# Altium PCB S4V_IMU_Sensor_Module_Board_V1.0_PCB.PcbDoc
Units mm, origin at the board's own origin, x right, y up, seen from the top; angles counter-clockwise.
Board outline 35 x 35 mm, 2 copper layers (Top Layer, Bottom Layer); 49 components, 33 nets, 214 pads, 90 vias.
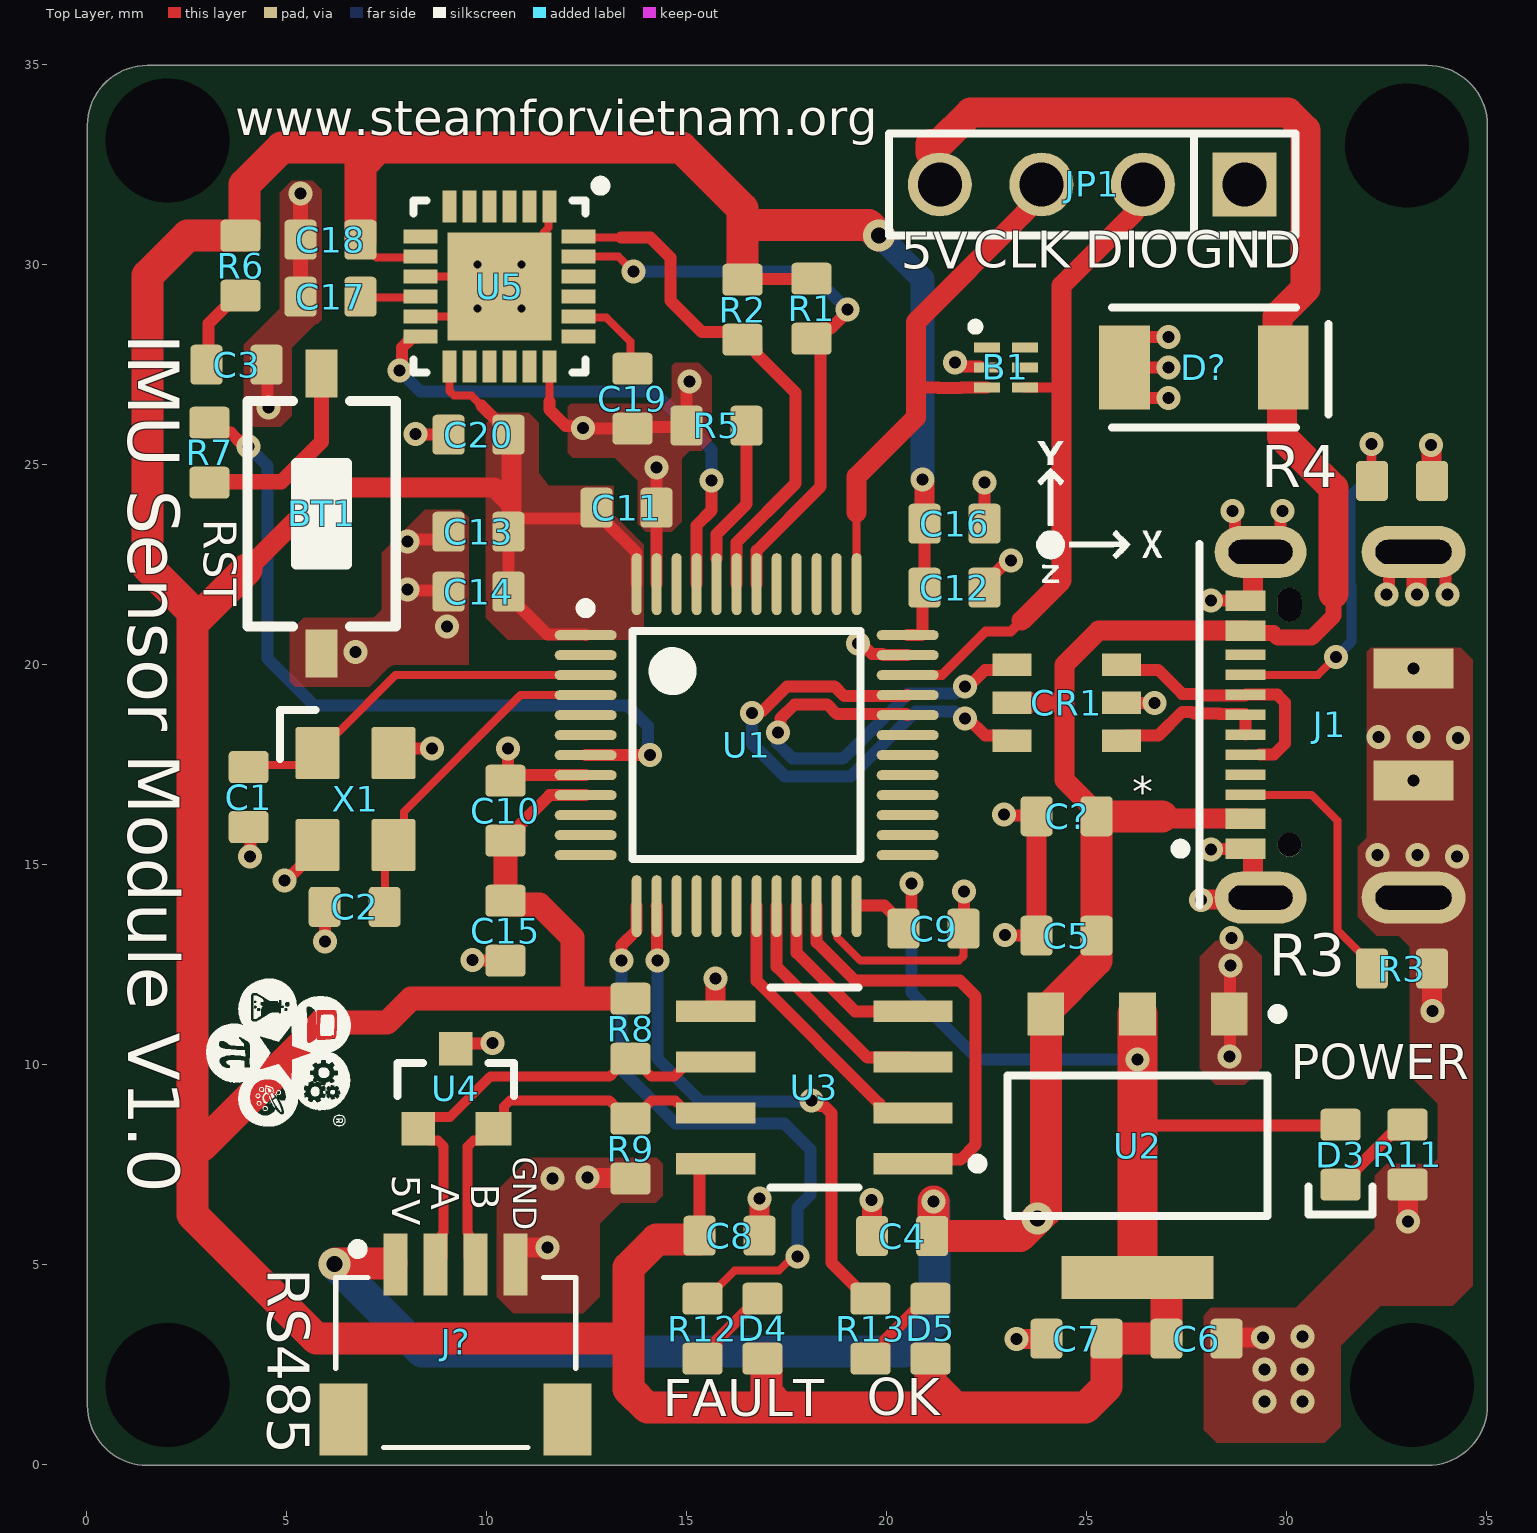
[diagram p0: Top Layer view]
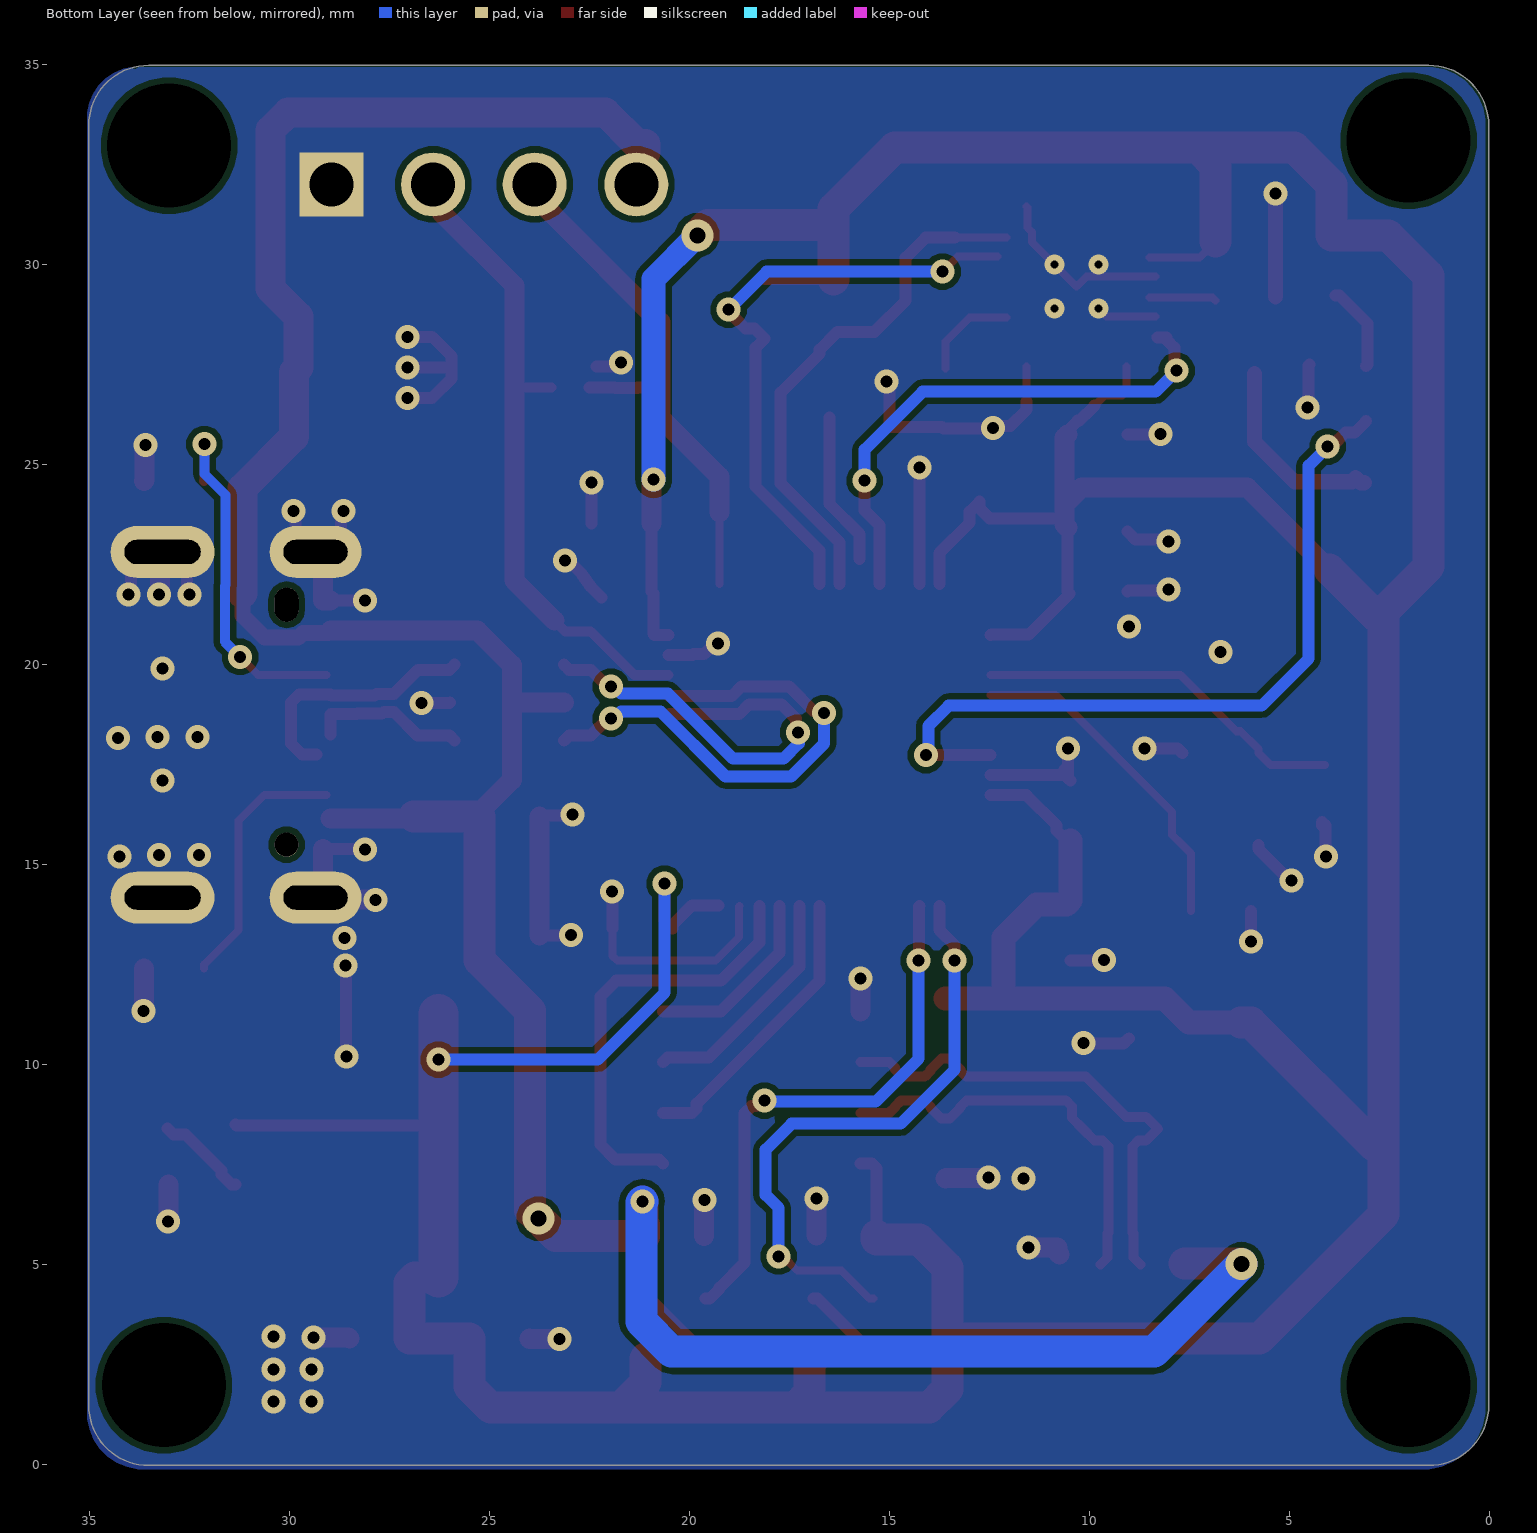
[diagram p1: Bottom Layer view, seen from below]
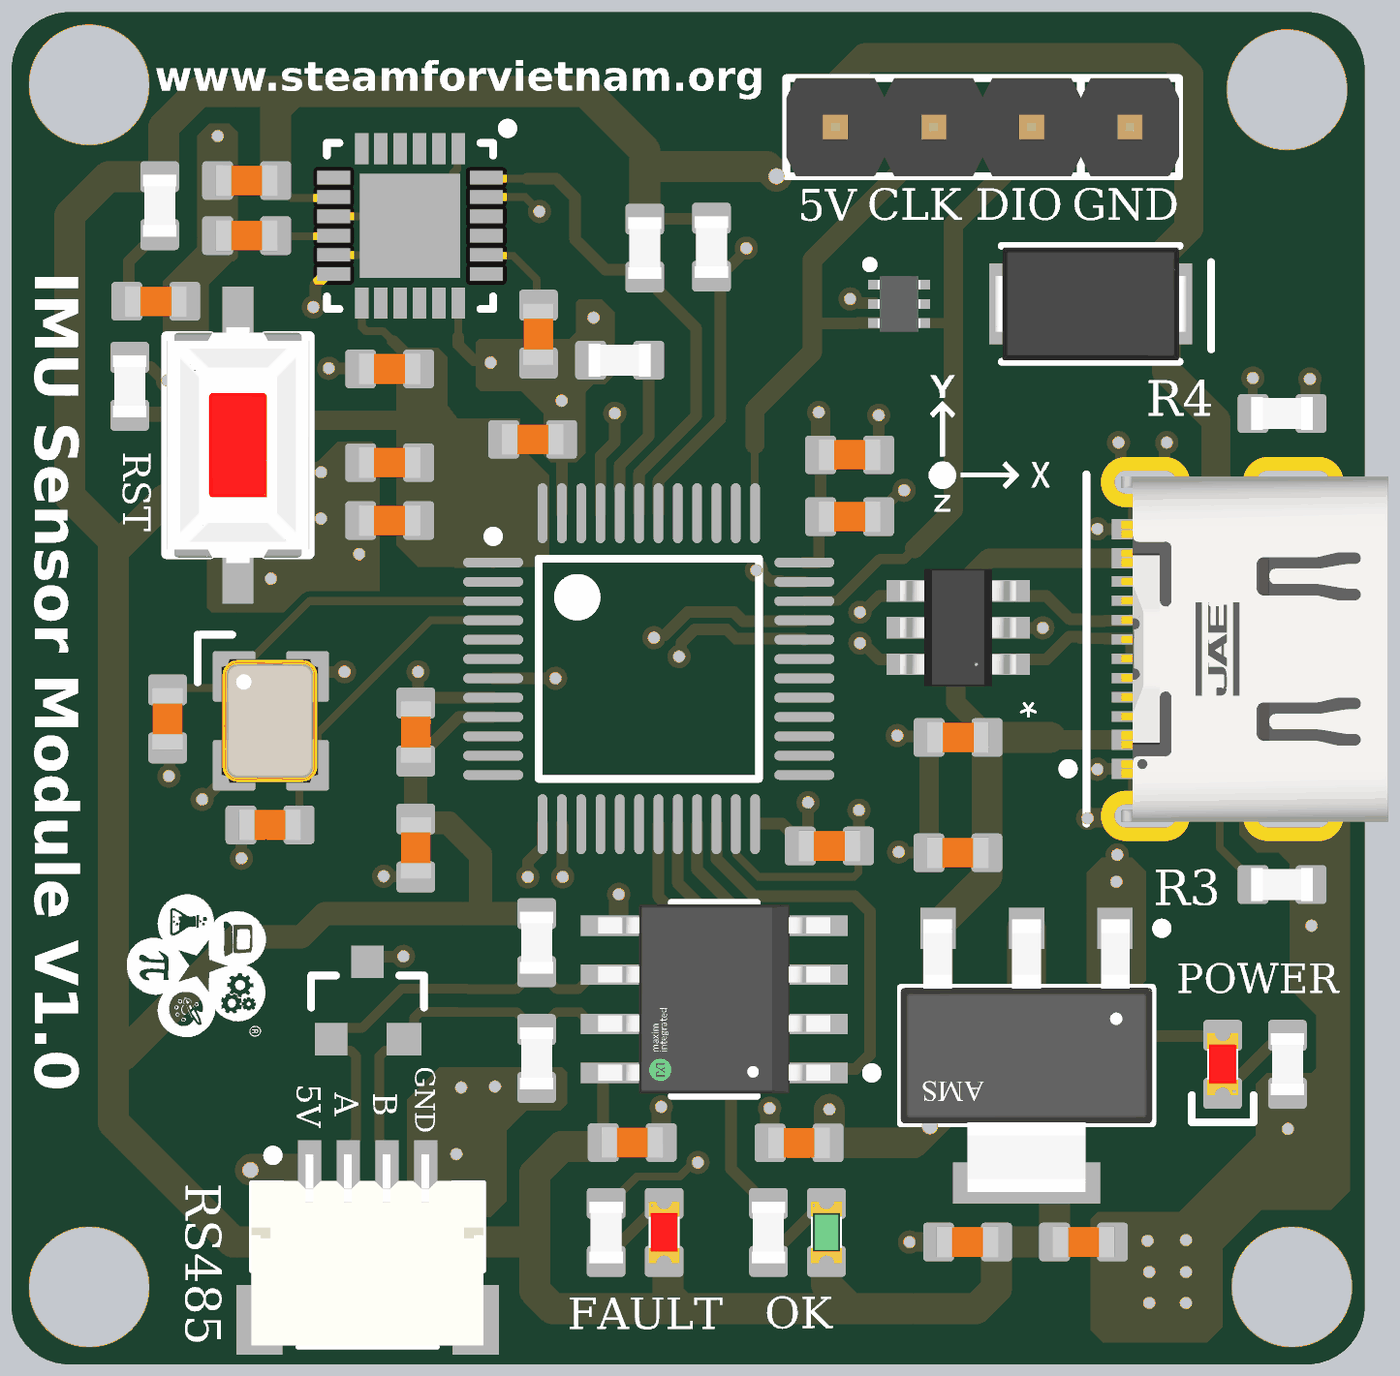
[diagram p2: 3D render of the assembled board from above, using the file's embedded part models]

## Layer stack, top to bottom
Top Solder: solder mask 0.0102, Solder Resist, Dk 3.5
Top Layer: signal copper 0.0356
Dielectric 1: dielectric 0.32, FR-4, Dk 4.8
Bottom Layer: signal copper 0.0356
Bottom Solder: solder mask 0.0102, Solder Resist, Dk 3.5

## Board outline
0.026,1.482 ccw(c1.526,1.482) 1.526,-0.018 33.526,-0.018 ccw(c33.526,1.482) 35.026,1.482 35.026,33.482 ccw(c33.526,33.482) 33.526,34.982 1.526,34.982 ccw(c1.526,33.482) 0.026,33.482

## Design rules (kind name [scope] priority, off if disabled: settings)
Clearance [All] p1: gap=0.15 ignorepadtopadclearanceinfootprint=TRUE
DiffPairsRouting DiffPairsRouting_RS485 [InDifferentialPairClass('120R')] p1: maxlimit=0.35 minlimit=0.35 mostfreqgap=0.35 toplayer_minwidth=0.25 toplayer_maxwidth=0.25 toplayer_prefwidth=0.25 bottomlayer_minwidth=0.25 bottomlayer_maxwidth=0.25 bottomlayer_prefwidth=0.25 impedanceprofiledriven=TRUE impedanceprofileid={570E3273-004C-4F14-956F-33786543DF5A} impedanceprofilevalue=120.000000 maxuncoupledlength=12.7
DiffPairsRouting DiffPairsRouting_1 [InDifferentialPairClass('90R')] p2: maxlimit=0.15 minlimit=0.15 mostfreqgap=0.15 toplayer_minwidth=0.3 toplayer_maxwidth=0.3 toplayer_prefwidth=0.3 bottomlayer_minwidth=0.3 bottomlayer_maxwidth=0.3 bottomlayer_prefwidth=0.3 impedanceprofiledriven=TRUE impedanceprofileid={4109E06E-1CCC-4906-AD44-ED409D68766E} impedanceprofilevalue=90.000000 maxuncoupledlength=12.7
DiffPairsRouting [All] p3: maxlimit=0.254 minlimit=0.254 mostfreqgap=0.254 toplayer_minwidth=0.381 toplayer_maxwidth=0.381 toplayer_prefwidth=0.381 bottomlayer_minwidth=0.381 bottomlayer_maxwidth=0.381 bottomlayer_prefwidth=0.381 maxuncoupledlength=12.7
HoleSize [All] p1: absolutevalues=TRUE maxlimit=4 minlimit=0.2 maxpercent=80.000 minpercent=20.000
MinimumSolderMaskSliver MinimumSolderMaskSliver_IMU [InComponent('U5')] p1: minsoldermaskwidth=0
MinimumSolderMaskSliver [All] p2: minsoldermaskwidth=0.2
PolygonConnect [All] p1: connectstyle=Direct reliefconductorwidth=0.254 reliefentries=4 polygonreliefangle="90 Angle" airgapwidth=0.254
RoutingVias [All] p1: holewidth=0.3 width=0.6 viastyle="Through Hole" minholewidth=0.2 minwidth=0.2 maxholewidth=0.4 maxwidth=0.8
SilkToSilkClearance [All] p1: silktosilkclearance=0.1
SilkToSolderMaskClearance [IsPad] p1: minsilkscreentomaskgap=0.1 clearancetoexposedcopper=TRUE
SolderMaskExpansion SolderMaskExpansion_VIA [IsVia] p1: expansion=0.102 istentingtop=TRUE
SolderMaskExpansion [All] p2: expansion=0 istentingtop=FALSE
Width [All] p1: maxlimit=1.3 minlimit=0.2 preferedwidth=0.254
25 further rules are at their usual default settings.

## Classes and differential pairs
differential pair class 120R: RS485
differential pair class 90R: USB_D USB_D_CON
differential pair USB_D: +USB_D_P -USB_D_N
differential pair USB_D_CON: +USB_D_CON_P -USB_D_CON_N
differential pair RS485: +RS485_P -RS485_N

## Components (designator, comment, footprint, x,y, rotation, side; value= is the part's Value field where it differs from the comment)
B1 "ESDALC6V1-5M6" ESDALC6V15M6 22.987,27.432 r270 top
BT1 "Nut Nhan 2 Chan SMD 3x6x2.5" "Nut Nhan 2 Chan SMD 3x6x2.5" 5.88,23.773 r270 top
C1 "20pF" CAP_0603 4.059,16.689 r90 top
C2 "20pF" CAP_0603 6.707,13.944 r0 top
C3 "100nF" CAP_0603 3.755,27.498 r180 top
C4 "10uF" CAP_0603 20.396,5.714 r0 top
C5 "100nF" CAP_0603 24.505,13.223 r0 top
C6 "10uF" CAP_0603 27.755,3.148 r180 top
C7 "100nF" CAP_0603 24.755,3.148 r0 top
C8 "1uF" CAP_0603 16.08,5.723 r180 top
C9 "10uF" CAP_0603 21.18,13.398 r180 top
C10 "100nF" CAP_0603 10.48,16.348 r270 top
C11 "100nF" CAP_0603 13.505,23.923 r180 top
C12 "100nF" CAP_0603 21.705,21.923 r180 top
C13 "100nF" CAP_0603 9.805,23.323 r0 top
C14 "100nF" CAP_0603 9.805,21.823 r0 top
C15 "1uF" CAP_0603 10.48,13.348 r90 top
C16 "100nF" CAP_0603 21.705,23.523 r180 top
C17 "100nF" CAP_0603 6.105,29.198 r0 top
C18 "10nF" CAP_0603 6.105,30.623 r0 top
C19 "2.2nF" CAP_0603 13.655,26.648 r90 top
C20 "100nF" CAP_0603 9.805,25.748 r0 top
C? "100nF" CAP_0603 24.509,16.21 r0 top
CR1 "USBLC6-2SC6" SOT23-6L_STM 24.511,19.05 r180 top
D3 "RED" LED_0603_RED 31.355,7.748 r90 top
D4 "RED" LED_0603_RED 16.905,3.398 r270 top
D5 "GREEN" LED_0603_GREEN 21.105,3.398 r270 top
D? "SMAJ5.0A" BOUR-SMA-2_V 27.94,27.432 r0 top
J1 "DX07S016JA3R1500" FP-DX07S016JA3R1500-MFG 32.03,18.498 r90 top
J? "JST_SH1.0" JST_SM04B-SRSS-TB(LF)(SN) 9.235,5.006 r0 top
JP1 "JP 1x04" "JP 1x4 DT" 28.956,32.004 r180 top
R1 "4.7k" RES_0603 18.13,28.898 r90 top
R2 "4.7k" RES_0603 16.405,28.873 r90 top
R3 "5.1k" RES_0603 32.891,12.4 r0 top
R4 "5.1k" RES_0603 32.891,24.592 r0 top
R5 "10k" RES_0603 15.755,25.973 r180 top
R6 "10k" RES_0603 3.855,29.973 r90 top
R7 "330" RES_0603 3.08,25.298 r270 top
R8 "1k" RES_0603 13.605,10.898 r270 top
R9 "1k" RES_0603 13.605,7.898 r90 top
R11 "1k" RES_0603 33.03,7.748 r270 top
R12 "1k" RES_0603 15.405,3.398 r90 top
R13 "1k" RES_0603 19.605,3.398 r90 top
U1 "STM32F103C8T6" STM-LQFP48_L 16.508,17.988 r0 top
U2 "AMS1117-3.3" FP-AMS1117-IPC_C 26.28,7.973 r270 top
U3 "MAX3485ESA+" FP-S8-5-MFG 18.201,9.43 r180 top
U4 "PSM712-LF-T7" PRKT-SOT23-3_V 9.235,9.396 r90 top
U5 "MPU-6050" IS-QFN-24_V 10.33,29.448 r270 top
X1 "8MHz" XTAL_3225 6.731,16.637 r270 top

## Footprints (in the part's own frame and the unit in brackets; to place one, negate y for a bottom-side part, rotate by r counter-clockwise, add the part's x,y. Pads: shape width x height; smd on the part's side, far side on the other; paste and mask are expansions set on the pad)
BOUR-SMA-2_V [mm] "SMA, 2-Leads, Body 4.57x2.92mm"
  rect 1.27x2.1 smd: 1(-1.985,0) 2(1.985,0)
  silkscreen extent -2.3,-1.5 3.12,1.5, body extent -2.5,-1.46 2.5,1.46, height 2.62
CAP_0603 [mm]
  rrect25% 0.8x1 smd: 1(-0.75,0) 2(0.75,0)
  body extent -0.8,-0.4 0.8,0.4, height 0.51
ESDALC6V15M6 [mm]
  rect 0.25x0.65 smd: 1(-0.5,-0.475) 2(0,-0.475) 3(0.5,-0.475) 4(0.5,0.475) 5(0,0.475) 6(-0.5,0.475)
  silkscreen extent -1.12,-0.86 -0.92,-0.66, body extent -0.73,-0.55 0.73,0.55, height 0.65
FP-AMS1117-IPC_C [mil]
  rect 42x36 smd paste+0 mask+0: 1(-129.72,90.16) 2(-129.72,0) 3(-129.72,-90.16)
  rect 42x150 smd paste+0 mask+0: 4(129.72,0)
  silkscreen extent -135,-128 69,143, body extent -153,-132 153,132, height 10
FP-DX07S016JA3R1500-MFG [mm]
  rrect100% 1.3x2.3 hole 1.6 slot 0.6 at 0 deg paste-2539.97 mask+0: 1(-4.32,2.675) 2(4.32,2.675)
  rrect100% 1.3x2.6 hole 1.9 slot 0.6 at 0 deg paste-2539.97 mask+0: 3(-4.32,-1.15) 6(4.32,-1.15)
  rect 1x2 smd paste+0 mask+0: 4(-1.4,-1.15) 5(1.4,-1.15)
  rect 0.52x1 smd paste+0 mask+0: A1/B12(-3.1,3.05) A4/B9(-2.35,3.05) A12/B1(3.1,3.05) B4/A9(2.35,3.05)
  rect 0.27x1 smd paste+0 mask+0: A5(-1.75,3.05) A6(-0.25,3.05) A7(0.75,3.05) A8(1.75,3.05) B5(1.25,3.05) B6(0.25,3.05) B7(-0.75,3.05) B8(-1.25,3.05)
  round 0.6 hole 0.6 unplated paste-2539.97 mask+0: ""(-3,1.95)
  rrect100% 0.85x0.6 hole 0.6 slot 0.85 at 0 deg unplated paste-2539.97 mask+0: ""(3,1.95)
  silkscreen extent -4.52,4.2 4.52,4.8, body extent -5.07,-3.9 5.07,3.92, height 0.25
FP-S8-5-MFG [mm]
  rect 1.98x0.53 smd paste+0 mask+0: 1(-2.465,1.905) 2(-2.465,0.635) 3(-2.465,-0.635) 4(-2.465,-1.905) 5(2.465,-1.905) 6(2.465,-0.635) 7(2.465,0.635) 8(2.465,1.905)
  silkscreen extent -4.2,-2.5 1.1,2.5, body extent -3.56,-2.75 3.55,2.75, height 0.25
IS-QFN-24_V [mm] "QFN, 24-Leads, Body 4x4mm, Pitch 0.5mm, Thermal Pad 2.7x2.6mm"
  rect 0.8x0.35 smd: 1(-2,1.25) 2(-2,0.75) 3(-2,0.25) 4(-2,-0.25) 5(-2,-0.75) 6(-2,-1.25) 13(2,-1.25) 14(2,-0.75) 15(2,-0.25) 16(2,0.25) 17(2,0.75) 18(2,1.25)
  rect 0.35x0.85 smd mask+0.102: 7(-1.25,-1.975) 8(-0.75,-1.975) 9(-0.25,-1.975) 10(0.25,-1.975) 11(0.75,-1.975) 12(1.25,-1.975) 19(1.25,1.975) 20(0.75,1.975) 21(0.25,1.975) 22(-0.25,1.975) 23(-0.75,1.975) 24(-1.25,1.975)
  rect 2.7x2.6 smd: 25(0,0)
  silkscreen extent -2.65,-2.15 2.15,2.65, body extent -2,-2 2,2, height 0.95
"JP 1x4 DT" [mm] "4 pins, 1 row, straight, gold plating"
  rect 1.6x1.6 hole 1.1: 1(0,0)
  round 1.6 hole 1.1: 2(2.54,0) 3(5.08,0) 4(7.62,0)
  silkscreen extent -1.27,-1.27 8.89,1.27, body extent -1.27,-1.27 8.89,1.27, height 8.54
JST_SM04B-SRSS-TB(LF)(SN) [mm]
  rect 0.6x1.55 smd: 1(-1.5,0) 2(-0.5,0) 3(0.5,0) 4(1.5,0)
  rect 1.2x1.8 smd: S1(-2.8,-3.875) S2(2.8,-3.875)
  silkscreen extent -3,-4.57 3,0.48, body extent -3.01,-4.53 2.99,0.42, height 2.91
LED_0603_GREEN [mm]
  rrect25% 0.8x1 smd: A(0.75,0) K(-0.75,0)
  body extent -0.8,-0.4 0.8,0.4, height 0.6
LED_0603_RED [mm]
  rrect25% 0.8x1 smd: A(0.75,0) K(-0.75,0)
  silkscreen extent -1.5,-0.8 -0.8,0.8, body extent -0.8,-0.4 0.8,0.4, height 0.6
"Nut Nhan 2 Chan SMD 3x6x2.5" [mm] "Switch SMD type"
  rect 1.2x0.8 smd: 1(-3.5,0) 2(3.5,0)
  silkscreen extent -2.82,-1.85 2.82,1.85, body extent -3.05,-1.85 3.05,1.85, height 2.5
PRKT-SOT23-3_V [mm] "SOT23, 3-Leads, Body 2.92x1.3mm, Pitch 0.94mm"
  rect 0.84x0.84 smd: 1(-1,0.94) 3(1,0)
  rect 0.84x0.9 smd: 2(-1,-0.94)
  silkscreen extent -0.18,-1.46 0.65,1.46, body extent -0.65,-1.46 0.65,1.46, height 1.17
RES_0603 [mm]
  rrect25% 0.8x1 smd: 1(-0.75,0) 2(0.75,0)
  body extent -0.8,-0.43 0.8,0.43, height 0.52
SOT23-6L_STM [mil]
  rect 38.5x22 smd paste+0 mask+0: 1(-53.75,37.4) 2(-53.75,0) 3(-53.75,-37.4) 4(53.75,-37.4) 5(53.75,0) 6(53.75,37.4)
  body extent -59,-60 59,60, height 57
STM-LQFP48_L [mm] "QFP, 48-Leads, Body 7x7mm, Pitch 0.5mm, IPC High Density"
  oval 1.55x0.25 smd: 1(-4.025,2.75) 2(-4.025,2.25) 3(-4.025,1.75) 4(-4.025,1.25) 5(-4.025,0.75) 6(-4.025,0.25) 7(-4.025,-0.25) 8(-4.025,-0.75) 9(-4.025,-1.25) 10(-4.025,-1.75) 11(-4.025,-2.25) 12(-4.025,-2.75) 25(4.025,-2.75) 26(4.025,-2.25) 27(4.025,-1.75) 28(4.025,-1.25) 29(4.025,-0.75) 30(4.025,-0.25) 31(4.025,0.25) 32(4.025,0.75) 33(4.025,1.25) 34(4.025,1.75) 35(4.025,2.25) 36(4.025,2.75)
  oval 0.25x1.55 smd: 13(-2.75,-4.025) 14(-2.25,-4.025) 15(-1.75,-4.025) 16(-1.25,-4.025) 17(-0.75,-4.025) 18(-0.25,-4.025) 19(0.25,-4.025) 20(0.75,-4.025) 21(1.25,-4.025) 22(1.75,-4.025) 23(2.25,-4.025) 24(2.75,-4.025) 37(2.75,4.025) 38(2.25,4.025) 39(1.75,4.025) 40(1.25,4.025) 41(0.75,4.025) 42(0.25,4.025) 43(-0.25,4.025) 44(-0.75,4.025) 45(-1.25,4.025) 46(-1.75,4.025) 47(-2.25,4.025) 48(-2.75,4.025)
  silkscreen extent -4.15,-2.85 2.85,3.55, body extent -3.5,-3.5 3.5,3.5, height 1.6
XTAL_3225 [mm]
  rrect10% 1.3x1.1 smd: 1(-1.15,-0.95) 2(1.15,-0.95) 3(1.15,0.95) 4(-1.15,0.95)
  silkscreen extent -2.23,-1.89 -1,-1, body extent -1.6,-1.28 1.6,1.23, height 0.61

## Part data
B1: "STMicroelectronics ESDALC6V1-5M6 Quint Uni-Directional TVS Diode, 30W peak, 6-Pin uQFN", Manufacturer_Name=STMicroelectronics, Mouser Part Number=511-ESDALC6V1-5M6, Arrow Part Number=ESDALC6V1-5M6, Arrow Price/Stock=https://www.arrow.com/en/products/esdalc6v1-5m6/stmicroelectronics?utm_currency=USD&region=nac, Datasheet Link=https://www.st.com/resource/en/datasheet/esdalc6v1-5m6.pdf, Geometry.Height=0.65mm, Manufacturer_Part_Number=ESDALC6V1-5M6, Mouser Price/Stock=https://www.mouser.co.uk/ProductDetail/STMicroelectronics/ESDALC6V1-5M6?qs=riAxU6JNBCsF7CaldDOuJw%3D%3D
C1 C2 C3 C4 C5 C6 C7 C8 C9 C10 C11 C12 C13 C14 C15 C16 C17 C18 C19 C20 C?: library part CAP_0603, "Capacitor SMD 0603"
CR1: "ESD Protection for USB 2.0 High Speed", Manufacturer_Name=STMicroelectronics, Copyright="Copyright (C) 2025 Ultra Librarian. All rights reserved.", Manufacturer_Part_Number=USBLC6-2SC6, RefDes=RefDes, Type=Type
D3 D4: library part LED_0603_RED, "LED 0603 RED SMD"
D5: library part LED_0603_GREEN, "LED 0603 GREEN SMD"
D?: library part CMP-2000-07090-1, "SMAJ Transient Voltage Suppressor Diode Series, 3.5 V, -55 to 150 degC, 2-Pin SMA, RoHS, Tape and Reel", Capacitance @ Frequency=-, Current - Peak Pulse (10/1000µs)=43.5A, Manufacturer=Bourns, Operating Temperature=-55°C~150°C(TJ), Package / Case=DO-214AC,SMA, Package Description="2-Pin Surface Mount Device, Body 4.315 x 2.605 mm", Package Reference=SMA-2, Power - Peak Pulse=400W, Power Line Protection=No, Standard Package=1, Supplier Device Package=SMA(DO-214AC), Voltage - Breakdown (Min)=6.4V, Voltage - Clamping (Max) @ Ipp=9.2V, Voltage - Reverse Standoff (Typ)=5V, Applications=GeneralPurpose, Bidirectional Channels=-, Catalog Drawings=SMAJSeriesFootprintSMAJ,SMBJSeries, Category=CircuitProtection, Datasheet URL=https://datasheet.ciiva.com/25624/0900766b8112213b-25624680.pdf, Datasheet Version=08/2012, EDA / CAD Models=DownloadfromAcceleratedDesigns, Family=TVS-Diodes, Featured Product=SMAJ/SMBJ/SMCJ/SMLJDiscreteTVSDiodes, Manufacturer URL=http://www.bourns.com/, Mounting Technology=SurfaceMount, Mounting Type=SurfaceMount, Online Catalog=SMAJSeries, Other Names=SMAJ5.0ABDKR, Packaging=Digi-Reel®, RoHS Information=SMAJSeriesMaterialDeclaration, Series=SMAJ, Type=Zener, Unidirectional Channels=1
J1: library part CMP-19038-000002-1, "CONN RCP USB2.0 TYP C 24P SMD RA"
J?: library part CMP-002-00071-1, "Connector Header Surface Mount, Right Angle 4 position 0.039 (1.00mm)", Case/Package=None, Check_prices=https://www.snapeda.com/parts/SM04B-SRSS-TB(LF)(SN)/JST/view-part/?ref=eda, Component Type=Standard, Design Item ID=SM04B-SRSS-TB(LF)(SN), MF="JST Sales", MP=SM04B-SRSS-TB(LF)(SN), Pins=6, SnapEDA_Link=https://www.snapeda.com/parts/SM04B-SRSS-TB(LF)(SN)/JST/view-part/?ref=snap, Source=SM04B-SRSS-TB(LF)(SN).SchLib
JP1: library part "JP 1x4 2.54 Duc Thang", "Cắm", Chung_Loai=Cắm, Don_Vi=Con, Ma_Hang=MH000903, Ten_Linh_Kien="Jump Đơn Đực 2.54MM 1x40P Thẳng 11MM"
R1 R2 R3 R4 R5 R6 R7 R8 R9 R11 R12 R13: library part RES_0603, "Resistor SMD 0603"
U1: library part CMP-0237-00215-3, "ARM Cortex-M3 32-bit MCU, 64 KB Flash, 20 KB Internal RAM, 37 I/Os, 48-pin LQFP, -40 to 85 degC, Tray", I/Os (High Current)=37, Operating Frequency(F) (Processor speed) (MHz)=72, Supply Voltage(Vcc) min (V)=2, A/D Converter="2x12-bit (10 Channel)", ComponentLink1Description="Manufacturer URL", ComponentLink1URL=http://www.st.com/web/en/home.html, ComponentLink2Description=Datasheet, ComponentLink2URL=http://www.st.com/st-web-ui/static/active/en/resource/technical/document/datasheet/CD00161566.pdf, ComponentLink3Description="Package Specification", ComponentLink3URL=http://www.st.com/st-web-ui/static/active/en/resource/technical/document/datasheet/DM00058181.pdf, Core="ARM Cortex-M3", DatasheetVersion="Rev. 16", FLASH Size (Prog) (kB)=64, Internal RAM Size (kB)=20, Mounting Technology="Surface Mount", PackageDescription="48-Pin Low Profile Quad Flat Package, 7 x 7 mm Body, 0.5 mm Pitch", PackageReference=LQFP48, PackageVersion="Rev. 6, 06/2013", Packing=Tray, PartNumber=STM32F103C8T6
U2: library part CMP-209535-000001-1, "LDO Voltage Regulators 1A, 3.3V", Dropout Voltage=1.1V, Manufacturer="Advanced Monolithic Systems", Max Junction Temp=+125°C, Max Power Dissipation=1.2W, Max Supply Voltage=15V, Nominal Supply Current=5mA, Output Current=1A, Output Voltage=3.3V, Package=AMS1117, Temperature="-40°C to +125°C", Temperature Range Low=-40°C, Automotive=No, Category=IC, ComponentLink2Description=Datasheet, ComponentLink2URL=http://www.advanced-monolithic.com/pdf/ds1117.pdf, Device Class L1="Integrated Circuits (ICs)", Device Class L2="Power Management ICs", Device Class L3="Voltage Regulators - Linear", Height=1.8mm, Ipc Land Pattern Name=SOT229P700X180-4, Lead Free=Yes, Manufacturer Part Number=AMS1117-3.3, Number Of Outputs=1, Octopart=https://octopart.com/ams1117-3.3-advanced+monolithic+systems-25899300, Output Type=Fixed, RoHS=TRUE, Standoff Height=0.64mm, Temperature Range High=+125°C
U3: library part CMP-05679-000038-1, "IC TXRX RS485/422 10MBPS 8SOIC", Manufacturer="Maxim Integrated", Manufacturer Part Number=MAX3485EESA+, Max Supply Voltage=3.6V, Min Supply Voltage=3V, Nominal Supply Current=0.95-1.1mA, Package=S8-5, Temperature="-40°C to +85°C", Temperature Range High=+85°C, Temperature Range Low=-40°C, Automotive=No, Category=IC, ComponentLink2Description=Datasheet, ComponentLink2URL=https://datasheets.maximintegrated.com/en/ds/MAX3483E-MAX3491E.pdf, Data Rate=15Mbits/s, Device Class L1="Integrated Circuits (ICs)", Device Class L2="Interface ICs", Device Class L3="RS-232 / RS-422 / RS-485 Interface ICs", Digikey Description="IC TXRX RS485/422 10MBPS 8SOIC", Footprint Url=https://pdfserv.maximintegrated.com/land_patterns/90-0096.PDF, Height=1.75mm, Interface=RS-485,RS-422, Lead Free=Yes, Mouser Description="RS-422/RS-485 Interface IC 3.3V 12Mbps Transceiver", Number Of Receivers=1, Number Of Transmitters=1, Octopart=https://octopart.com/max3485eesa%2B-maxim+integrated-39731903, RoHS=TRUE, Simplex Duplex="Half Duplex", Standoff Height=0.1mm
U4: library part CMP-2000-07553-1, "TVS Array - Asymmetrical Data Line Protector, 600 W, 7.5 V, -55 to 150 degC, 3-Pin SOT23, RoHS, Tape and Reel", Capacitance=75pF, Case\/Package=SOT-23, Clamping Voltage=17V, Current=20uA, Manufacturer="Protek Devices", Max Operating Temperature=150degC, Min Breakdown Voltage=7.5V, Min Operating Temperature=-55degC, Package Description="3-Pin Small Outline Transistor, Body 2.92 x 1.3 mm, Pitch 0.94 mm", Package Reference=SOT23-3, Power Dissipation=600W, Voltage=12V, Working Voltage=7V, Datasheet URL=www.protekdevices.com/xyz/documents/datasheets/psm712.pdf, Datasheet Version=10/2013, Depth=1.4mm, Direction=Bidirectional, Element Configuration=Dual, Lead Free=LeadFree, Leakage Current=20uA, Length=3.04mm, Manufacturer URL=http://www.protekdevices.com/, Mounting Technology=SurfaceMount, Number of Pins=3, Packaging=TapeandReel, Radiation Hardening=No, RoHSCompliant=True
U5: library part CMP-1753-00002-2, "3-Axis Gyroscope, Accelerometer and a Digital Motion Processor(TM) (DMP), 2.375 to 3.46 V, -40 to 85 degC, 24-Pin QFN, RoHS, Tape and Reel", Manufacturer=InvenSense, Standard Package=5,000, Category=Sensors,Transducers, Datasheet URL=http://datasheet.octopart.com/MPU-6050-InvenSense-datasheet-14421344.pdf, Datasheet Version="Rev. 3.3, 05/2012", Dynamic Catalog=MPU-6000™Series, Family=Multifunction, Featured Product=MPU-60506-Axis,IntegratedI²CSolution, Manufacturer URL=http://www.invensense.com/, Online Catalog=MPU-6000™Series, Other Names="1428-1007-2 / MPU6050", Output Type=Digital, Sensor Type=MotionTracking, Unit PriceUSD=Digital
X1: library part TSX-3225_24.0000MF15X-AC, "Crystal SMD 24MHz 10PPM 7pF 3225", Manufacturer=Epson, Manufacturer Part Number="TSX-3225 24.0000MF15X-AC"
BT1: Ma_Hang=MH001036, Ten="Nút Nhấn 2 Chân 3x6x2.5MM SMD"

## Free pads (board coordinates)
  round 1.524 hole 3.1 mask+0.102: 2(2.03,1.986) 2(2.03,33.101) 2(33.018,32.974) 2(33.145,1.986)

## Via types
v1: diameter 0.6, hole 0.3, Top Layer to Bottom Layer, tented both sides, 83 vias
v2: diameter 0.5, hole 0.2, Top Layer to Bottom Layer, tented both sides, 4 vias
v3: diameter 0.8, hole 0.4, Top Layer to Bottom Layer, tented both sides, 3 vias

## Nets (pads, with @x,y where several pads share a name; then routed paths per layer and width w, separated by ;. In a path a pad name is that pad's centre, name@x,y a point inside that pad or via, vN(x,y) a via of type N, cw(c..) or ccw(c..) an arc to the next point about the centre after c; other vN are vias at no path point)
+3V3: C6.2 C7.2 C8.2 C9.2 C10.2 C11.2 C12.2 C13.2 C14.2 C15.2 C16.2 C18.2 C20.2 D3.A D4.A D5.A R1.2 R2.2 R6.2 R8.1 U1.1 U1.9 U1.24 U1.36 U1.48 U2.2 U2.4 U3.8 U5.8 U5.13 | length 170
  Top Layer w0.2: C18.2@6.855,30.573 7.255,30.173 U5.8@8.505,30.173 ; U5.13 9.08,26.84 9.197,26.723 9.63,26.723 9.88,26.473
  Top Layer w0.3: 9.88,26.473 10.105,26.248 10.109,26.248 10.259,26.098 10.305,26.098 10.555,25.848 C20.2 ; C10.2 10.58,15.598 10.83,15.848 10.83,15.984 11.584,16.738 U1.9 ; C14.2@10.505,21.773 11.53,20.748 12.473,20.748 U1.1 ; C14.2 C13.2 C13.2@10.555,23.423 ; C13.2@10.63,23.498 10.786,23.654 12.505,23.654 12.755,23.904 C11.2 12.755,24.073 13.005,23.823 13.005,23.548 13.758,22.795 U1.48 ; C8.2 15.33,7.41 15.445,7.525 U3.8 ; R2.2 16.418,29.636 18.117,29.636 R1.2 ; U1.24@19.283,13.979 19.949,13.979 20.43,13.498 C9.2 20.63,13.598 v1@20.63,14.298 ; U1.36 20.885,20.738 20.91,20.763 20.91,21.778 20.955,21.823 C12.2 C16.2 ; 26.28,8.474 31.331,8.474 D3.A
  Top Layer w0.5: 4.005,22.373 6.055,24.423 10.205,24.423 10.63,23.998 ; C13.2@10.555,23.423 10.63,23.498 10.63,23.998 ; C20.2 10.63,25.673 10.63,23.998 ; v1(20.905,24.623) 20.905,24.596 20.955,24.546 C16.2
  Top Layer w0.6: 6.223,11.049 7.52,11.049 8.119,11.648 12.155,11.648 ; C10.2 C15.2 10.58,13.998 11.33,13.998 12.155,13.173 12.155,11.648 ; R8.1 12.155,11.648
  Top Layer w0.8: 2.885,7.965 5.969,11.049 6.223,11.049 ; 4.005,22.373 2.805,21.173 2.654,21.324 ; C18.2@6.855,30.573 C18.2 6.855,32.479 7.299,32.923 ; C8.2 15.33,5.623 14.255,5.623 13.555,4.923 13.555,3.148 ; R2.2 16.405,30.988 ; D4.A 17.005,2.648 17.005,1.792 17.374,1.423 ; v3(19.812,30.734) 19.558,30.988 16.405,30.988 ; D5.A 21.105,2.048 21.73,1.423 ; U2.4 26.872,4.678 27.005,4.545 C6.2 C7.2 25.505,1.948 24.98,1.423 21.73,1.423 ; 2.654,21.324 2.654,7.965 2.654,6.249 5.755,3.148 13.555,3.148 ; 2.654,21.324 1.53,22.448 1.53,29.723 2.53,30.723 R6.2 3.955,30.723 3.955,31.998 4.88,32.923 7.299,32.923 ; 7.299,32.923 14.88,32.923 16.405,31.398 16.405,30.988 ; 13.555,3.148 13.555,1.892 14.024,1.423 17.374,1.423 ; 17.374,1.423 21.73,1.423
  Top Layer w1: U2.4 26.28,8.474 v1(26.28,10.123) U2.2
  Bottom Layer w0.3: v1(20.63,14.523) 20.63,11.798 22.305,10.123 v1(26.28,10.123)
  Bottom Layer w0.6: v3(19.812,30.734) 20.905,29.641 v1(20.905,24.623)
+5V: C4.2 C5.2 C?.2 CR1.5 D?.2 J1.A4/B9 J1.B4/A9 J?.1 JP1.4 U2.3 | length 74.6
  Top Layer w0.4: J1.B4/A9 29.04,20.788 29.675,20.788 29.79,20.673 30.63,20.673 31.18,21.223 31.18,21.773
  Top Layer w0.5: CR1.5 24.398,19.05 ; 24.448,17.121 24.448,19.991 25.305,20.848 J1.B4/A9 ; 24.483,17.086 25.259,16.31 C?.2 ; 26.892,16.21 26.954,16.148 J1.A4/B9
  Top Layer w0.75: 21.102,32.8 21.102,33.02 21.322,33.02 22.107,33.805 30.041,33.805 30.48,33.366 30.48,29.398 29.78,28.698 29.78,27.432 29.896,27.316 29.896,25.696 31.18,24.412 31.18,21.773
  Top Layer w0.8: v3(6.204,5.011) 6.225,5.032 J?.1@7.635,5.032 ; v1(21.18,6.582) 21.18,6.024 21.146,5.99 C4.2 23.346,5.714 23.99,6.358 U2.3 23.99,11.344 25.255,12.609 C5.2 25.255,13.323 25.259,13.327 C?.2 26.892,16.21
  Bottom Layer w0.8: v3(6.204,5.011) 8.392,2.823 20.455,2.823 21.209,3.577 21.209,6.553 v1(21.18,6.582)
  other v3: 23.78,6.148
DE: U1.20 U3.3 | length 5.9
  Top Layer w0.3: U1.20 17.258,12.445 19.523,10.18 20.551,10.18 U3.3
FAULT: R12.2 U1.13 | length 15.2
  Top Layer w0.2: R12.2 15.505,4.148 16.205,4.848 17.313,4.848 17.672,5.207 v1(17.78,5.207)
  Top Layer w0.3: v1@13.38,12.823 13.38,12.985 13.758,13.363 U1.13
  Bottom Layer w0.3: v1(13.38,12.598) 13.38,9.873 14.73,8.523 17.455,8.523 18.105,7.873 18.105,6.743 17.78,6.418 v1(17.78,5.207)
GND: B1.2 BT1.2 C1.1 C2.1 C3.1 C4.1 C5.1 C6.1 C7.1 C8.1 C9.1 C10.1 C11.1 C12.1 C13.1 C14.1 C15.1 C16.1 C17.1 C18.1 C19.1 C20.1 C?.1 CR1.2 D?.1 J1.1 J1.2 J1.3 J1.4 J1.5 J1.6 J1.A1/B12 J1.A12/B1 J?.4 JP1.1 R3.2 R4.2 R5.2 R9.1 R11.2 U1.8 U1.23 U1.35 U1.47 U2.1 U3.5 U4.3 U5.1 U5.9 U5.11 U5.18 U5.25 X1.2 X1.4 | length 74.7
  Top Layer w0.2: U5.11 9.58,28.698 v2(9.78,28.898) ; U5.9 10.08,29.698 U5.25 v2(10.88,29.998) 11.442,30.56 11.442,30.811 11.555,30.924 11.555,31.423 U5.1 ; 11.58,26.573 U5.18 ; U1.23 18.768,13.953 18.768,13.185 19.355,12.598 20.896,12.598 21.813,12.598 21.93,12.715 C9.1
  Top Layer w0.3: v1(4.094,15.208) 4.107,15.221 4.107,15.978 4.191,16.062 C1.1@4.191,15.978 ; C3.1 4.53,27.473 4.53,26.448 v1(4.555,26.423) ; v1(4.953,14.605) 4.999,14.605 5.781,15.387 X1.2 ; v1(5.969,13.081) 5.963,13.087 5.963,13.837 C2.1@5.969,13.843 ; X1.4 7.801,17.907 v1(8.636,17.907) ; v1(8.03,21.873) 8.055,21.848 9.03,21.848 C14.1 ; v1(8.03,23.073) 8.087,23.13 8.862,23.13 C13.1 ; v1(8.229,25.764) 8.237,25.756 9.047,25.756 C20.1 ; U4.3@9.025,10.66 9.157,10.528 10.147,10.528 v1(10.16,10.541) ; v1(9.65,12.616) 9.658,12.607 10.471,12.607 C15.1 ; C10.1 10.541,17.159 v1(10.541,17.907) ; C10.1@10.63,17.248 C10.1@10.63,17.383 ; C10.1@10.715,17.238 U1.8 ; 11.58,26.573 11.58,26.373 11.985,25.968 12.36,25.968 v1(12.418,25.911) 12.43,25.898 C19.1 13.692,25.936 14.967,25.936 R5.2 15.005,26.998 v1(15.08,27.073) ; C11.1 v1(14.255,24.923) ; C11.1@14.257,23.923 14.257,23.123 14.258,23.122 U1.47 ; v1(19.292,20.534) 19.373,20.534 19.645,20.263 19.908,20.263 19.933,20.238 U1.35 ; v1(21.717,27.559) 21.798,27.559 21.9,27.457 B1.2@22.337,27.457 ; C9.1 21.938,13.406 21.938,14.316 v1(21.946,14.324) ; C12.1@22.205,21.673 C12.1 22.705,22.273 23.038,22.606 v1(23.114,22.606) ; C16.1 v1(22.455,24.548) ; v1(22.937,16.257) 22.96,16.233 23.736,16.233 C?.1 ; v1(22.973,13.243) 22.982,13.233 23.745,13.233 C5.1 ; CR1.2@26,19.05 26.002,19.047 26.699,19.047 v1(26.701,19.044) ; v1(27.051,26.67) 26.44,26.67 25.955,27.155 D?.1 ; v1(27.051,27.432) D?.1 ; v1(27.051,28.194) 26.44,28.194 25.955,27.709 D?.1 ; v1(28.115,15.385) 28.122,15.391 29.164,15.391 J1.A1/B12@29.167,15.388 ; v1(28.115,21.608) 28.12,21.603 28.975,21.603 J1.A12/B1 ; v1(28.58,10.198) 28.593,10.211 28.593,12.461 v1(28.605,12.473) ; v1(28.659,23.842) 28.717,23.784 28.717,23.28 29.179,22.818 J1.2 29.389,22.818 29.851,23.28 29.851,23.784 v1(29.908,23.842) ; v1(32.507,21.754) 32.564,21.812 32.564,22.356 33.026,22.818 J1.6 33.511,22.818 33.973,22.356 33.973,21.812 v1(34.031,21.754)
  Top Layer w0.381: C17.1 C18.1 v1(5.355,31.773)
  Top Layer w0.5: J?.4@10.755,5.248 10.805,5.298 10.805,5.423 v1(11.53,5.423) ; v1(12.53,7.173) 12.542,7.161 13.593,7.161 R9.1 ; v1(15.73,12.148) 15.73,11.341 U3.5 ; C8.1 v1(16.83,6.648) ; v1(19.635,6.611) 19.64,6.605 19.64,5.72 C4.1 ; v1(23.252,3.147) C7.1 ; C5.1 23.757,13.225 23.757,16.208 C?.1 ; v1(27.861,14.115) 27.88,14.134 29.311,14.134 J1.1 29.167,14.366 J1.A1/B12@29.167,15.388 ; C6.1 28.536,3.179 v1(29.411,3.179) ; J1.A12/B1 29.158,21.598 29.168,21.608 29.168,22.631 J1.2 ; R11.2 33.036,6.992 33.036,6.082 v1(33.041,6.076) ; J1.6 33.25,22.748 33.25,21.773 v1(33.269,21.754) ; v1(33.611,25.487) 33.626,25.472 33.626,24.607 R4.2 ; R3.2 33.647,12.394 33.647,11.341 v1(33.654,11.335)
  other v1: 29.455,1.573 30.405,1.573 29.455,2.373 30.405,2.373 30.405,3.198 11.655,7.148 28.627,13.169 34.261,15.207 32.274,15.24 33.274,15.24 33.18,17.098 34.29,18.161 32.303,18.194 33.303,18.194 33.18,19.898 6.731,20.32 9.017,20.955
  other v2: 10.88,28.898 9.78,29.998
IMU_CPOUT: C19.2 U5.20 | length 2.4
  Top Layer w0.2: U5.20@12.08,28.673 13.005,28.673 13.605,28.073 C19.2@13.605,27.398
IMU_INT: U1.45 U5.12 | length 13.4
  Top Layer w0.2: U5.12@8.305,28.148 U5.12
  Top Layer w0.3: v1(7.83,27.348) 7.887,27.405 7.887,27.925 8.08,28.117 8.08,28.173 U5.12@8.305,28.173 ; U1.45 15.258,23.482 15.63,23.854 v1(15.63,24.598)
  Bottom Layer w0.3: v1(7.83,27.348) 8.355,26.823 14.18,26.823 15.63,25.373 v1(15.63,24.598)
IMU_REGOUT: C17.2 U5.10 | length 1.7
  Top Layer w0.2: C17.2@6.855,29.098 6.932,29.175 U5.10@8.503,29.175
IMU_SCL: R1.1 U1.42 U5.23 | length 15.5
  Top Layer w0.2: U5.23 13.305,30.198 v1@13.762,29.741
  Top Layer w0.3: U1.42 16.758,22.851 18.355,24.448 18.355,27.923 R1.1 18.38,28.398 18.604,28.398 v1@19.055,28.848
  Bottom Layer w0.3: v1(13.68,29.823) 18.08,29.823 v1(19.03,28.873)
IMU_SDA: R2.1 U1.43 U5.24 | length 13.3
  Top Layer w0.2: U5.24@12.08,30.673 13.365,30.673
  Top Layer w0.3: 13.365,30.673 14.105,30.673 14.605,30.173 14.605,29.098 15.386,28.317 16.311,28.317 16.755,27.873 16.755,27.773 17.73,26.798 17.73,24.53 16.258,23.058 U1.43
MCU_OSCIN: C1.2 U1.3 X1.1 | length 9.4
  Top Layer w0.203: C1.2@4.12,17.491 5.485,17.491 X1.1 5.781,17.887 6.229,18.335 6.329,18.335 7.732,19.738 U1.3
MCU_OSCOUT: C2.2 U1.4 X1.3 | length 8.4
  Top Layer w0.203: C2.2@7.469,13.843 7.469,15.275 X1.3 7.941,15.747 7.941,16.323 10.856,19.238 U1.4
NetBT1_1: BT1.1 R7.2 | length 5
  Top Layer w0.381: R7.2@3.13,24.548 3.23,24.548 3.36,24.678 3.36,24.653 3.44,24.573 4.88,24.573 5.88,25.573 BT1.1
NetC3_2: C3.2 R6.1 | length 2.2
  Top Layer w0.3: C3.2@3.093,27.46 3.055,27.498 3.055,28.523 3.755,29.223 R6.1
NetD3_K: D3.K R11.1 | length 2.3
  Top Layer w0.3: D3.K 31.455,6.998 31.705,7.248 31.705,7.348 32.605,8.248 32.905,8.248 R11.1@33.055,8.398
NetD4_K: D4.K R12.1 | length 2.2
  Top Layer w0.3: R12.1 15.505,2.648 15.755,2.898 15.755,3.098 16.805,4.148 D4.K
NetD5_K: D5.K R13.1 | length 2.2
  Top Layer w0.3: R13.1 19.705,2.648 19.955,2.898 19.955,3.098 21.005,4.148 D5.K
NetJ1_A5: J1.A5 R3.1 | length 6.5
  Top Layer w0.2: J1.A5@29.079,16.746 30.632,16.746 31.28,16.098 31.28,13.361 32.141,12.5 R3.1
NetJ1_B5: J1.B5 R4.1 | length 8.9
  Top Layer w0.2: J1.B5@29.079,19.746 30.795,19.746 v1(31.242,20.193)
  Top Layer w0.25: v1@32.131,25.4 32.131,24.602 R4.1
  Bottom Layer w0.25: v1(31.242,20.193) 31.623,20.574 31.623,21.971 31.605,21.989 31.605,24.239 32.135,24.769 v1(32.135,25.511)
NetR5_1: R5.1 U1.44 | length 3.8
  Top Layer w0.3: U1.44@15.758,22.638 15.758,23.265 16.505,24.012 R5.1@16.505,26.178
NetR7_1: R7.1 U1.7 | length 19.3
  Top Layer w0.3: R7.1@3.093,26.086 3.38,25.798 3.613,25.798 3.905,25.505 3.998,25.505 v1(4.055,25.448) ; U1.7 v1(14.095,17.738)
  Bottom Layer w0.3: v1(4.055,25.448) 4.53,24.973 4.53,20.148 5.705,18.973 13.53,18.973 14.038,18.465 14.038,17.795 v1(14.095,17.738)
OK: R13.2 U1.14 | length 13.9
  Top Layer w0.3: U1.14 14.269,13.952 14.269,12.609 v1(14.28,12.598) ; v1(18.13,9.098) 18.211,9.098 18.347,8.962 18.454,8.962 18.63,8.786 18.63,5.048 19.255,4.423 19.255,4.398 19.505,4.148 R13.2
  Bottom Layer w0.3: v1(14.28,12.598) 14.28,10.148 15.355,9.073 18.105,9.073 v1(18.13,9.098)
RE: U1.19 U3.2 | length 7.2
  Top Layer w0.3: U1.19 16.758,12.095 19.826,9.027 19.826,8.91 19.941,8.795 U3.2
RS485_N: J?.3 R9.2 U3.7 U4.2 | length 10.4
  Top Layer w0.25: J?.3 9.56,5.181 9.56,5.777 9.535,5.802 9.535,6.854 9.535,7.955 9.681,8.101 9.88,8.101 U4.2 10.443,8.665 10.443,8.955 10.59,9.101 11.569,9.101 11.572,9.098 13.084,9.098 13.23,8.952 13.23,8.923 13.505,8.648 R9.2 13.705,8.648 13.98,8.923 13.98,8.952 14.126,9.098 14.725,9.098 14.871,8.952 14.871,8.935 15.011,8.795 U3.7
RS485_P: J?.2 R8.2 U3.6 U4.1 | length 12.4
  Top Layer w0.25: J?.2 8.91,5.181 8.91,5.777 8.935,5.802 8.935,6.605 8.935,7.955 8.788,8.101 8.59,8.101 U4.1 8.59,8.691 9.09,8.691 10.1,9.701 11.817,9.701 11.821,9.698 13.084,9.698 13.23,9.844 13.23,9.873 13.505,10.148 R8.2 13.705,10.148 13.98,9.873 13.98,9.844 14.126,9.698 14.693,9.698 14.871,9.877 14.871,9.925 15.011,10.065 U3.6
SWCLK: B1.3 JP1.3 U1.37 | length 13.7
  Top Layer w0.2: 19.255,23.798 19.255,22.016 U1.37
  Top Layer w0.3: 20.737,26.924 21.302,26.924 21.305,26.922 21.87,26.922 21.881,26.932 B1.3
  Top Layer w0.5: 19.255,23.798 19.255,24.698 20.737,26.18 20.737,26.924 20.737,28.563 23.431,31.257 23.431,31.261 23.876,31.706 JP1.3
SWDIO: B1.4 JP1.2 U1.34 | length 16.5
  Top Layer w0.254: U1.34 20.535,19.74 21.391,19.74 22.479,20.828 23.114,20.828 23.384,21.098 ; B1.4 24.376,26.932 24.384,26.924
  Top Layer w0.5: 23.384,21.098 24.384,22.098 24.384,26.924 24.384,29.476 26.206,31.298 26.206,31.794 JP1.2
USART3_RX: U1.22 U3.1 | length 10.9
  Top Layer w0.3: U1.22 18.258,13.059 19.219,12.098 21.84,12.098 22.23,11.708 22.23,7.998 21.857,7.625 20.767,7.625 U3.1
USART3_TX: U1.21 U3.4 | length 4.7
  Top Layer w0.3: U1.21 17.758,12.795 19.218,11.335 U3.4
USB_D_CON_N: CR1.4 U1.32 | length 11.1
  Top Layer w0.3: v1(17.293,18.302) 17.35,18.36 17.35,18.653 17.706,19.008 18.519,19.008 18.764,18.763 19.686,18.763 20.508,18.763 U1.32 ; v1(21.971,19.45) 22.052,19.45 22.473,19.871 23.016,19.871 CR1.4
  Bottom Layer w0.3: v1(17.293,18.302) 17.272,18.282 17.272,18.034 17.653,17.653 18.922,17.653 20.544,19.275 21.715,19.275 21.89,19.45 v1(21.971,19.45)
USB_D_CON_P: CR1.6 U1.33 | length 12.9
  Top Layer w0.3: v1(16.643,18.79) 16.7,18.848 16.909,18.848 17.52,19.458 18.705,19.458 18.951,19.213 20.508,19.213 U1.33 ; v1(21.971,18.65) 22.052,18.65 22.473,18.229 23.016,18.229 CR1.6
  Bottom Layer w0.3: v1(16.643,18.79) 16.643,18.027 16.954,17.715 17.467,17.203 19.108,17.203 20.73,18.825 21.715,18.825 21.89,18.65 v1(21.971,18.65)
USB_D_N: CR1.3 J1.A7 J1.B7 | length 6.3
  Top Layer w0.3: CR1.3 26.006,19.871 26.794,19.871 27.393,19.272 27.833,19.272 27.882,19.223 28.325,19.223 28.335,19.233 28.965,19.233 J1.A7 29.774,19.248 29.972,19.05 29.972,18.034 29.689,17.751 J1.B7@29.33,17.751
USB_D_P: CR1.1 J1.A6 J1.B6 | length 3.9
  Top Layer w0.3: CR1.1 26.006,18.229 26.806,18.229 27.398,18.822 27.647,18.822 27.695,18.773 28.325,18.773 28.335,18.763 28.965,18.763 J1.B6 J1.A6
pads on no net: B1.1 B1.5 B1.6 J1. J1.A8 J1.B8 J?.S1 J?.S2 U1.2 U1.5 U1.6 U1.10 U1.11 U1.12 U1.15 U1.16 U1.17 U1.18 U1.25 U1.26 U1.27 U1.28 U1.29 U1.30 U1.31 U1.38 U1.39 U1.40 U1.41 U1.46 U5.2 U5.3 U5.4 U5.5 U5.6 U5.7 U5.14 U5.15 U5.16 U5.17 U5.19 U5.21 U5.22

## Polygon pours and split planes (outlines as drawn)
GND on Bottom Layer "GND_L02_P000" (solid, pour order 0): 33.86,34.891 33.81,34.941 1.56,34.941 ccw(c1.56,33.491) 0.11,33.491 0.11,1.441 ccw(c1.66,1.441) 1.66,-0.109 33.66,-0.109 ccw(c33.66,1.291) 35.06,1.291 35.06,33.666 ccw(c33.785,33.666) 33.785,34.941
+3V3 on Top Layer "+3V3_L01_P008" (solid, pour order 8): 10.53,20.623 9.98,21.173 9.98,25.923 9.98,26.023 10.238,26.298 11.055,26.298 11.305,26.048 11.305,24.798 11.555,24.473 13.18,24.473 13.18,23.748 13.93,22.998 13.93,20.948 13.605,20.623 13.18,20.623
GND on Top Layer "GND_L01_P006" (solid, pour order 6): 11.08,7.673 10.255,6.848 10.255,4.198 10.667,3.786 12.418,3.786 12.83,4.198 12.83,6.023 13.355,6.548 14.23,6.548 14.405,6.723 14.405,7.523 14.255,7.673
GND on Top Layer "GND_L01_P005" (solid, pour order 5): 28.105,3.923 27.93,3.723 27.93,0.873 28.255,0.548 30.955,0.548 31.355,0.948 31.355,2.973 32.355,3.973 34.155,3.973 34.655,4.473 34.655,20.123 34.355,20.423 32.105,20.423 32.005,20.323 32.005,15.673 31.78,15.448 31.78,13.698 32.255,13.223 32.805,13.223 33.08,12.948 33.08,9.723 33.78,9.023 33.78,7.648 33.655,7.523 32.505,7.523 32.205,7.223 32.205,5.898 30.23,3.923 30.18,3.923
GND on Top Layer "GND_L01_P004" (solid, pour order 4): 27.83,9.898 28.23,9.498 28.955,9.498 29.38,9.923 29.38,12.723 29.005,13.098 28.23,13.098 27.83,12.698 28.23,13.098 27.83,12.698
GND on Top Layer "GND_L01_P003" (solid, pour order 3): 12.03,26.448 12.03,25.298 12.155,25.173 13.205,25.173 13.78,24.598 13.78,23.523 13.98,23.323 14.63,23.323 14.88,23.573 14.88,25.148 15.08,25.348 15.38,25.348 15.63,25.598 15.63,27.223 15.305,27.548 14.705,27.548 14.63,27.473 14.63,26.698 14.455,26.523 12.105,26.523
GND on Top Layer "GND_L01_P002" (solid, pour order 2): 5.13,32.098 4.83,31.798 4.83,28.898 4.03,28.098 3.93,27.998 3.93,26.198 4.18,25.948 4.855,25.948 5.13,26.223 5.13,27.923 5.73,28.523 5.78,28.523 5.88,28.623 5.88,31.873 5.655,32.098
GND on Top Layer "GND_L01_P001" (solid, pour order 1): 5.43,21.173 5.13,20.873 5.08,20.873 5.08,19.573 5.205,19.448 6.43,19.448 9.38,19.448 9.555,19.623 9.555,23.673 9.355,23.873 8.455,23.873 7.38,22.798 7.38,21.373 7.18,21.173

## Silkscreen, mask and mechanical layers (free items; w line width, h text height)
Top Overlay:
  drawing of 37 lines, arcs and shapes, not listed
  text "www.steamforvietnam.org" at 3.727,32.949 h1.5
  text "CLK" at 22.157,29.607 h1.6
  text "DIO" at 24.957,29.607 h1.6
  text "GND" at 27.457,29.607 h1.6
  text "5V" at 20.357,29.588 h1.6
  text "IMU Sensor Module V1.0" at 0.625,28.269 h2.2 r270
  text "RST" at 2.655,23.644 h1.4 r270
  text "R3" at 29.555,11.873 h1.8
  text "POWER" at 30.105,9.348 h1.5
  text "GND" at 10.467,7.696 h1 r270
  text "5V" at 7.405,7.246 h1.2 r270
  text "A" at 8.38,7.02 h1.2 r270
  text "B" at 9.38,7.021 h1.2 r270
  text "RS485" at 4.18,4.908 h1.8 r270
  text "OK" at 19.505,0.917 h1.6
  text "FAULT" at 14.405,0.898 h1.6
Mechanical 13:
  the board outline again, w0.254

## Text inside footprints (layer, text, board x,y; h text height)
CR1: Top Overlay "*" at 26.67,17.526 h0.76 r180
D3: Mechanical 13 "+" at 30.747,9.065 h0.5 r90
D4: Mechanical 13 "+" at 17.513,2.081 h0.5 r270
D5: Mechanical 13 "+" at 21.713,2.081 h0.5 r270